# Altium PCB PCB_CSN_V3_1.PcbDoc
Units mil, origin at the board's own origin, x right, y up, seen from the top; angles counter-clockwise.
Board outline 3040 x 2075 mil, 2 copper layers (Top Layer, Bottom Layer); 91 components, 64 nets, 347 pads, 0 vias.
Unrouted connection lines stored in the file: 191.
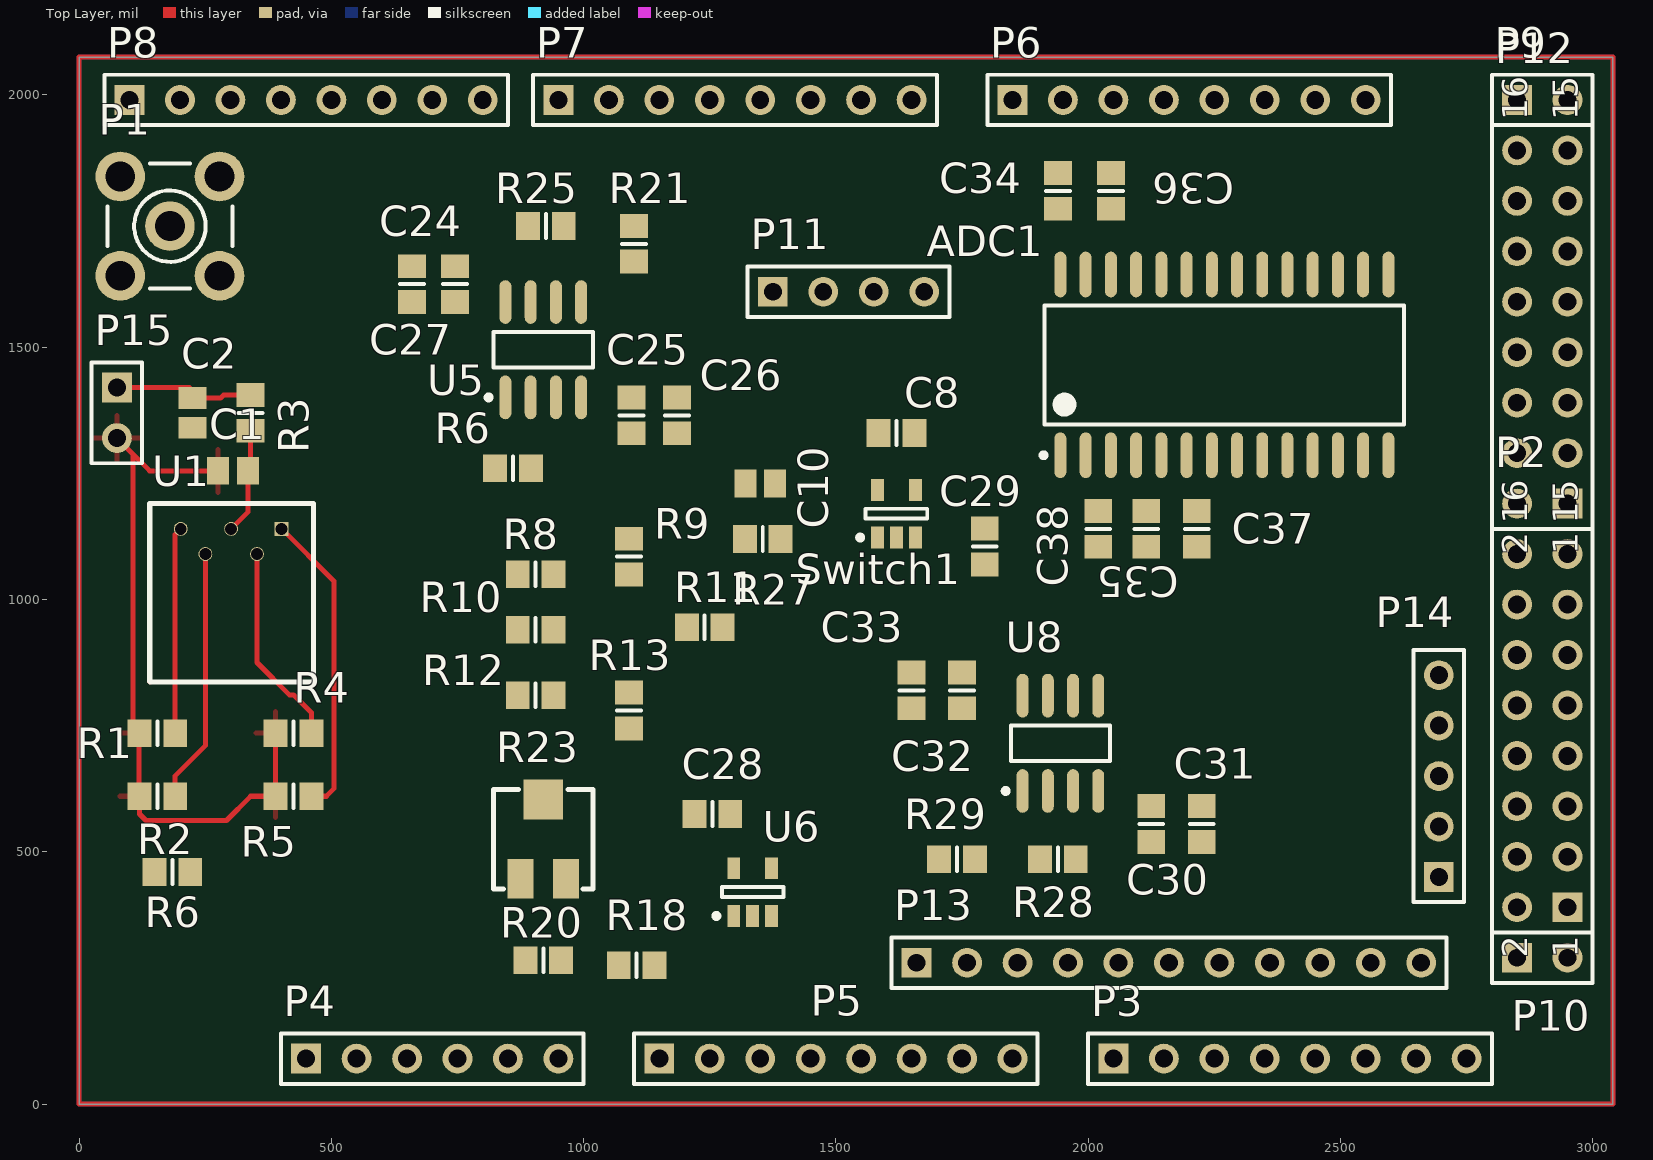
[diagram p0: Top Layer view]
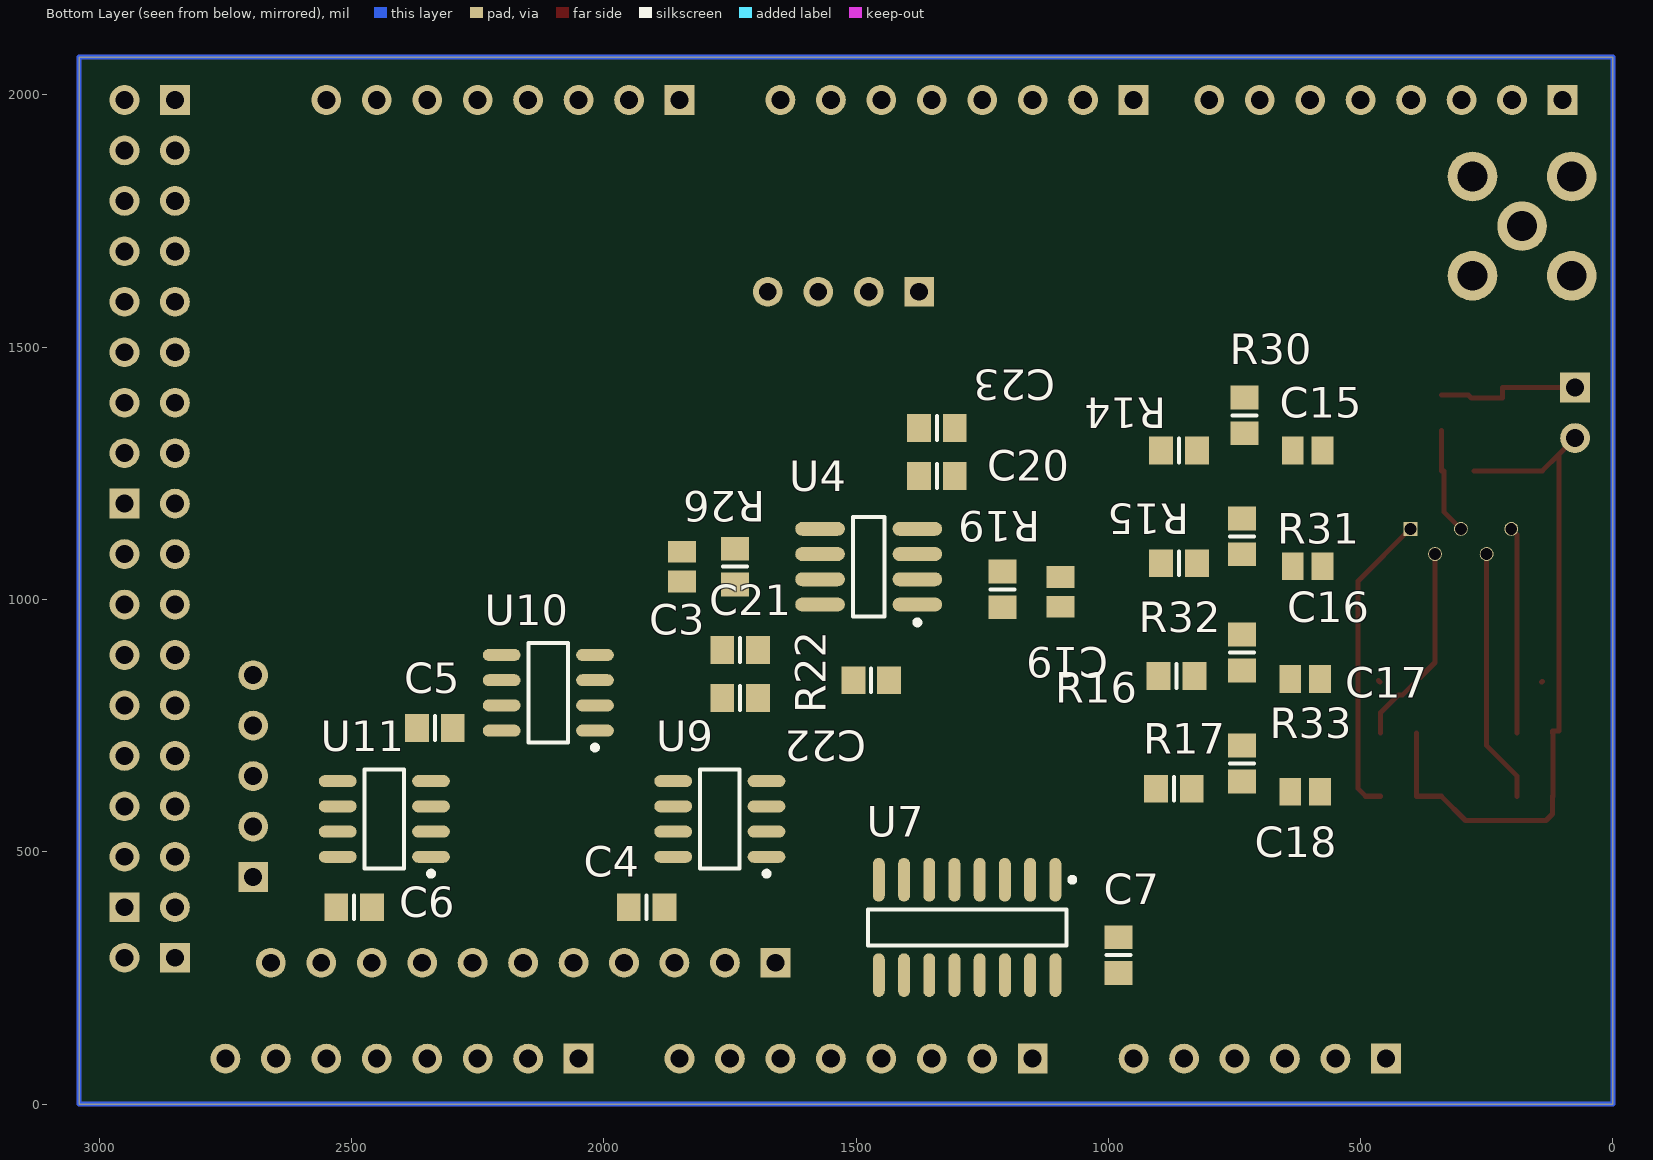
[diagram p1: Bottom Layer view, seen from below]

## Layer stack, top to bottom
Top Layer: signal copper 1.4
Dielectric: dielectric 12.6, FR-4, Dk 4.8
Bottom Layer: signal copper 1.4

## Board outline
0,0 0,2075 3040,2075 3040,0 0,0

## Design rules (kind name [scope] priority, off if disabled: settings)
Clearance [All] p1: gap=15
PolygonConnect [All] p1: connectstyle=Relief reliefconductorwidth=10 reliefentries=4 polygonreliefangle="90 Angle"
RoutingVias [All] p1: holewidth=28 width=50 viastyle="Through Hole" minholewidth=28 minwidth=50 maxholewidth=28 maxwidth=50
SilkscreenOverComponentPads [All] p1: minsilkscreentomaskgap=10
SolderMaskExpansion [All] p1: expansion=4
Width [All] p1: maxlimit=10 minlimit=10 preferedwidth=10
27 further rules are at their usual default settings.

## Classes and differential pairs
net class digital: DGND NetADC1_18 NetADC1_23 NetADC1_25 NetSwitch1_4
net class analog: NetADC1_1 NetADC1_4 NetC29_1 NetR18_2 NetR23_W NetR25_2
component class Hamamatsu_acond_2: C1 C2 C3 C10 C15 C16 C17 C18 C19 C20 C21 C22 C23 C24 C25 C26 C27 C28 P1 P15 R1 R2 R3 R4 R5 R6 R8 R9 R10 R11 R12 R13 R14 R15 R16 R17 R18 R19 R20 R21 R22 R23 R25 R26 R27 R30 R31 R32 R33 U1 U4 U5 U6
component class Logica_ADC: ADC1 C4 C5 C6 C7 C8 C29 C30 C31 C32 C33 C34 C35 C36 C37 C38 P2 P3 P4 P5 P6 P7 P8 P9 P10 P11 P12 P13 P14 R28 R29 Switch1 U7 U8 U9 U10 U11
net class potencia: +5 -5 GND

## Components (designator, comment, footprint, x,y, rotation, side; value= is the part's Value field where it differs from the comment)
ADC1 "LTC1415" SO28_N 2270,1465 r90 top
C1 "Cap" C0805 305,1255 r0 top
C2 "Cap" C0805 225,1370 r90 top
C3 "Cap" C0805 1845,1065 r270 bottom
C4 "Cap" 6-0805_N 1915,390 r180 bottom
C5 "Cap" 6-0805_N 2335,745 r0 bottom
C6 "Cap" 6-0805_N 2495,390 r180 bottom
C7 "Cap" 6-0805_N 980,295 r90 bottom
C8 "Cap" 6-0805_N 1620,1330 r180 top
C10 "Cap" C0805 1350,1230 r0 top
C15 "Cap" C0805 605,1295 r0 bottom
C16 "Cap" C0805 605,1065.76 r0 bottom
C17 "Cap" C0805 610,842.43 r0 bottom
C18 "Cap" C0805 610,619.09 r0 bottom
C19 "Cap" C0805 1095,1015 r270 bottom
C20 "Cap Pol3" 6-0805_N 1340,1245 r0 bottom
C21 "Cap Pol3" 6-0805_N 1730,900 r0 bottom
C22 "Cap" 6-0805_N 1730,805 r180 bottom
C23 "Cap" 6-0805_N 1340,1340 r0 bottom
C24 "Cap" 6-0805_N 745,1625 r270 top
C25 "Cap" 6-0805_N 1095,1365 r270 top
C26 "Cap Pol3" 6-0805_N 1185,1365 r90 top
C27 "Cap Pol3" 6-0805_N 660,1625 r90 top
C28 "Cap" 6-0805_N 1255,575 r180 top
C29 "Cap" 6-0805_N 1795,1105 r90 top
C30 "Cap" 6-0805_N 2125,555 r270 top
C31 "Cap Pol3" 6-0805_N 2225,555 r90 top
C32 "Cap" 6-0805_N 1750,820 r270 top
C33 "Cap Pol3" 6-0805_N 1650,820 r90 top
C34 "Cap Pol3" 6-0805_N 1940,1810 r90 top
C35 "Cap Pol3" 6-0805_N 2115,1140 r270 top
C36 "Cap" 6-0805_N 2045,1810 r270 top
C37 "Cap" 6-0805_N 2215,1140 r90 top
C38 "Cap" 6-0805_N 2020,1140 r270 top
P1 "SMB" SMB_V-RJ45 180,1740 r0 top
P2 "Header 8X2" HDR2X8 2950,390 r90 top
P3 "Header 8" HDR1X8 2050,90 r0 top
P4 "Header 6" HDR1X6 450,90 r0 top
P5 "Header 8" HDR1X8 1150,90 r0 top
P6 "Header 8" HDR1X8 1850,1990 r0 top
P7 "Header 8" HDR1X8 950,1990 r0 top
P8 "Header 8" HDR1X8 100,1990 r0 top
P9 "Header 2" HDR1X2 2850,1990 r0 top
P10 "Header 2" HDR1X2 2850,290 r0 top
P11 "Header 4" HDR1X4 1375,1610 r0 top
P12 "Header 8X2" HDR2X8 2950,1190 r90 top
P13 "Header 11" HDR1X11 1660,280 r0 top
P14 "Header 5" HDR1X5 2695,450 r90 top
P15 "Header 2" HDR1X2 75,1420 r270 top
R1 "Res3" 6-0805_N 155,735 r0 top
R2 "Res3" 6-0805_N 155,610 r0 top
R3 "Res3" 6-0805_N 340,1370 r90 top
R4 "Res3" 6-0805_N 425,735 r0 top
R5 "Res3" 6-0805_N 425,610 r0 top
R6 "Res3" 6-0805_N 185,460 r180 top
R6 "Res3" 6-0805_N 860,1260 r180 top
R8 "Res3" 6-0805_N 905,1050 r180 top
R9 "Res3" 6-0805_N 1090,1085 r270 top
R10 "Res3" 6-0805_N 905,940 r180 top
R11 "Res3" 6-0805_N 1240,945 r180 top
R12 "Res3" 6-0805_N 905,810 r180 top
R13 "Res3" 6-0805_N 1090,780 r90 top
R14 "Res3" 6-0805_N 860,1295 r0 bottom
R15 "Res3" 6-0805_N 860,1071.67 r0 bottom
R16 "Res3" 6-0805_N 865,848.33 r0 bottom
R17 "Res3" 6-0805_N 870,625 r0 bottom
R18 "Res3" 6-0805_N 1105,275 r180 top
R19 "Res3" 6-0805_N 1210,1020 r270 bottom
R20 "Res3" 6-0805_N 920,285 r180 top
R21 "Res3" 6-0805_N 1100,1705 r90 top
R22 "Res3" 6-0805_N 1470,840 r180 bottom
R23 "RPot SM" POT4MM-2 920,525 r90 top
R25 "Res3" 6-0805_N 925,1740 r180 top
R26 "Res3" 6-0805_N 1740,1065 r270 bottom
R27 "Res3" 6-0805_N 1355,1120 r0 top
R28 "Res3" 6-0805_N 1940,485 r0 top
R29 "Res3" 6-0805_N 1740,485 r0 top
R30 "Res3" 6-0805_N 730,1365 r270 bottom
R31 "Res3" 6-0805_N 735,1125 r270 bottom
R32 "Res3" 6-0805_N 735,895 r270 bottom
R33 "Res3" 6-0805_N 735,675 r270 bottom
Switch1 "SN74LVC1G66DBVR" SOT23-5_N 1620,1170 r90 top
U1 "MPPC_S10985" S10985_HAM 140,1190 r0 top
U4 "AD8056" SO-8_M 1475,1065 r0 bottom
U5 "AD8056" S8_N 920,1495 r90 top
U6 "ADCMP600" SOT23-5_N 1335,420 r90 top
U7 "SN74LS279AD" D016_N 1280,350 r270 bottom
U8 "THS4062" S8_N 1945,715 r90 top
U9 "DS1100-500" SO-8_L 1770,565 r0 bottom
U10 "DS1100-500" SO-8_L 2110,815 r0 bottom
U11 "DS1100-500" SO-8_L 2435,565 r0 bottom

## Footprints (in the part's own frame and the unit in brackets; to place one, negate y for a bottom-side part, rotate by r counter-clockwise, add the part's x,y. Pads: shape width x height; smd on the part's side, far side on the other; paste and mask are expansions set on the pad)
6-0805_N [mm] "Chip Resistor, Body 2.0x1.2mm, IPC Medium Density"
  rect 1.2x1.4 smd: 1(-0.9,0) 2(0.9,0)
  silkscreen extent 0,-0.6 0,0.6, body extent -1.07,-0.7 1.07,0.7, height 0.7
C0805 [mm] "Chip Capacitor, Body 2.0x1.3mm, IPC High Density"
  rect 1.1x1.4 smd: 1(-0.75,0) 2(0.75,0)
  body extent -1.1,-0.72 1.1,0.72, height 1.4
D016_N [mm] "SOIC, 16-Leads, Body 9.9x3.9mm, Pitch 1.27mm, IPC Medium Density"
  oval 2.2x0.6 smd: 1(-2.4,4.445) 2(-2.4,3.175) 3(-2.4,1.905) 4(-2.4,0.635) 5(-2.4,-0.635) 6(-2.4,-1.905) 7(-2.4,-3.175) 8(-2.4,-4.445) 9(2.4,-4.445) 10(2.4,-3.175) 11(2.4,-1.905) 12(2.4,-0.635) 13(2.4,0.635) 14(2.4,1.905) 15(2.4,3.175) 16(2.4,4.445)
  silkscreen extent -2.52,-5 0.9,5.42, body extent -1.95,-4.95 1.95,4.95, height 1.75
HDR1X2 [mm] "Connector; Header; 2 Position"
  rect 1.5x1.5 hole 0.9: 1(0,0)
  round 1.5 hole 0.9: 2(2.54,0)
  silkscreen extent -1.27,-1.27 3.81,1.27
HDR1X4 [mm] "Connector; Header; 4 Position"
  rect 1.5x1.5 hole 0.9: 1(0,0)
  round 1.5 hole 0.9: 2(2.54,0) 3(5.08,0) 4(7.62,0)
  silkscreen extent -1.27,-1.27 8.89,1.27
HDR1X5 [mm] "Connector; Header; 5 Position"
  rect 1.5x1.5 hole 0.9: 1(0,0)
  round 1.5 hole 0.9: 2(2.54,0) 3(5.08,0) 4(7.62,0) 5(10.16,0)
  silkscreen extent -1.27,-1.27 11.43,1.27
HDR1X6 [mm] "Connector; Header; 6 Position"
  rect 1.5x1.5 hole 0.9: 1(0,0)
  round 1.5 hole 0.9: 2(2.54,0) 3(5.08,0) 4(7.62,0) 5(10.16,0) 6(12.7,0)
  silkscreen extent -1.27,-1.27 13.97,1.27
HDR1X8 [mm] "Connector; Header; 8 Position"
  rect 1.5x1.5 hole 0.9: 1(0,0)
  round 1.5 hole 0.9: 2(2.54,0) 3(5.08,0) 4(7.62,0) 5(10.16,0) 6(12.7,0) 7(15.24,0) 8(17.78,0)
  silkscreen extent -1.27,-1.27 19.05,1.27
HDR1X11 [mm] "Connector; Header; 11 Position"
  rect 1.5x1.5 hole 0.9: 1(0,0)
  round 1.5 hole 0.9: 2(2.54,0) 3(5.08,0) 4(7.62,0) 5(10.16,0) 6(12.7,0) 7(15.24,0) 8(17.78,0) 9(20.32,0) 10(22.86,0) 11(25.4,0)
  silkscreen extent -1.27,-1.27 26.67,1.27
HDR2X8 [mm] "Connector; Header; 8x2 Position"
  rect 1.5x1.5 hole 0.9: 1(0,0)
  round 1.5 hole 0.9: 2(0,2.54) 3(2.54,0) 4(2.54,2.54) 5(5.08,0) 6(5.08,2.54) 7(7.62,0) 8(7.62,2.54) 9(10.16,0) 10(10.16,2.54) 11(12.7,0) 12(12.7,2.54) 13(15.24,0) 14(15.24,2.54) 15(17.78,0) 16(17.78,2.54)
  silkscreen extent -1.27,-1.27 19.05,3.81
POT4MM-2 [mm] "Square Trimming Potentiometer"
  rect 2x1.3 smd: CCW(-2,-1.15) CW(-2,1.15)
  rect 2x2 smd: W(2,0)
  silkscreen extent -2.5,-2.5 2.5,2.5
S8_N [mm] "SOIC, 8-Leads, Body 4.9x3.9mm, Pitch 1.27mm, IPC Medium Density"
  oval 2.2x0.6 smd: 1(-2.4,1.905) 2(-2.4,0.635) 3(-2.4,-0.635) 4(-2.4,-1.905) 5(2.4,-1.905) 6(2.4,-0.635) 7(2.4,0.635) 8(2.4,1.905)
  silkscreen extent -2.52,-2.5 0.9,2.88, body extent -2,-2.5 2,2.5, height 1.76
S10985_HAM [mm]
  rect 0.7x0.7 hole 0.6: 1(6.64,-1.27)
  round 0.7 hole 0.6: 2(5.4,-2.54) 3(4.1,-1.27) 4(2.8,-2.54) 5(1.56,-1.27)
  Top Layer lines w0.254: 0,-8.95 0.025,-8.975 ; 8.175,-8.975 8.25,-8.9
  silkscreen extent 0,-8.97 8.25,0
SMB_V-RJ45 [mm] "Connector; SMB Straight"
  round 2.5 hole 1.5: 1(0,0) 2(-2.5,-2.5) 2(-2.5,2.5) 2(2.5,-2.5) 2(2.5,2.5)
  silkscreen extent -3.15,-3.15 3.15,3.15
SO28_N [mm] "28-Pin Plastic Small Outline Integrated Circuit 1.27 mm Pitch, IPC Medium Density"
  oval 2.3x0.6 smd: 1(-4.55,8.255) 2(-4.55,6.985) 3(-4.55,5.715) 4(-4.55,4.445) 5(-4.55,3.175) 6(-4.55,1.905) 7(-4.55,0.635) 8(-4.55,-0.635) 9(-4.55,-1.905) 10(-4.55,-3.175) 11(-4.55,-4.445) 12(-4.55,-5.715) 13(-4.55,-6.985) 14(-4.55,-8.255) 15(4.55,-8.255) 16(4.55,-6.985) 17(4.55,-5.715) 18(4.55,-4.445) 19(4.55,-3.175) 20(4.55,-1.905) 21(4.55,-0.635) 22(4.55,0.635) 23(4.55,1.905) 24(4.55,3.175) 25(4.55,4.445) 26(4.55,5.715) 27(4.55,6.985) 28(4.55,8.255)
  silkscreen extent -4.67,-9.05 3,9.23, body extent -3.8,-9.06 3.8,9.06, height 2.65
SO-8_L [mm] "SOIC, 8-Leads, Body 4.9x3.9mm, Pitch 1.27mm, IPC High Density"
  oval 1.9x0.6 smd: 1(-2.35,1.905) 2(-2.35,0.635) 3(-2.35,-0.635) 4(-2.35,-1.905) 5(2.35,-1.905) 6(2.35,-0.635) 7(2.35,0.635) 8(2.35,1.905)
  silkscreen extent -2.47,-2.5 1,2.88, body extent -1.95,-2.45 1.95,2.45, height 1.75
SO-8_M [mm] "SOIC, 8-Leads, Body 4.9x3.9mm, Pitch 1.27mm, IPC Low Density"
  oval 2.5x0.7 smd: 1(-2.45,1.905) 2(-2.45,0.635) 3(-2.45,-0.635) 4(-2.45,-1.905) 5(2.45,-1.905) 6(2.45,-0.635) 7(2.45,0.635) 8(2.45,1.905)
  silkscreen extent -2.57,-2.5 0.8,2.93, body extent -2,-2.5 2,2.5, height 1.75
SOT23-5_N [mm] "SOT23, 5-Leads, Body 2.9x1.6mm, Pitch 0.95mm, Lead Span 2.8mm, IPC Medium Density"
  rect 1.1x0.65 smd: 1(-1.2,0.95) 2(-1.2,0) 3(-1.2,-0.95) 4(1.2,-0.95) 5(1.2,0.95)
  silkscreen extent -1.32,-1.55 0.25,1.95, body extent -0.9,-1.55 0.9,1.55, height 1.45

## Part data
C1 C2 C3 C4 C5 C6 C7 C8 C10 C15 C16 C17 C18 C19 C22 C23 C24 C25 C28 C29 C30 C32 C36 C37 C38: "Capacitor"
C20 C21 C26 C27 C31 C33 C34 C35: "Polarized Capacitor (Surface Mount)"
P1: "SMB Straight Connector"
P2 P12: "Header, 8-Pin, Dual row"
P3 P5 P6 P7 P8: "Header, 8-Pin"
P4: "Header, 6-Pin"
P9 P10 P15: "Header, 2-Pin"
P11: "Header, 4-Pin"
P13: "Header, 11-Pin"
P14: "Header, 5-Pin"
R1 R2 R3 R4 R5 R6 R6 R8 R9 R10 R11 R12 R13 R14 R15 R16 R17 R18 R19 R20 R21 R22 R25 R26 R27 R28 R29 R30 R31 R32 R33: "Resistor"
R23: "Square Trimming Potentiometer"
U4: library part AD8002AR, "Dual 600MHz, 50mW Current Feedback Amplifier"
U5 U8: library part LT1253CS8, "Low Cost Dual Video Amplifier"
U7: "Quadruple S-R Latches"

## Nets (pads, with @x,y where several pads share a name; then routed paths per layer and width w, separated by ;. In a path a pad name is that pad's centre, name@x,y a point inside that pad or via, vN(x,y) a via of type N, cw(c..) or ccw(c..) an arc to the next point about the centre after c; other vN are vias at no path point)
70_GND: C1.1 P15.2 R1.1 R2.1 R4.1 R5.1 R6.2@149.57,460 | length 1377.8
  Top Layer w10: P15.2 107,1288 ; R1.1 119.57,739 R1.1@119,739 ; C1.1 140,1255 107,1288 ; R4.1 R5.1 340,610 292,562 132.57,562 119.57,575 R2.1 119,610 R1.1@119,739 ; 107,1288 107,739 R1.1@119,739
+5: ADC1.21 ADC1.26 ADC1.27 ADC1.28 C4.2 C5.1 C6.1 C7.1 C8.2 C21.1 C22.2 C24.2 C27.1 C28.1 C32.2 C33.1 C34.1 C36.2 P11.1 R18.1 Switch1.5 U4.8 U5.8 U6.5 U7.16 U8.8 U9.8 U10.8 U11.8
+70V: C2.2 P15.1 R3.2 | length 287.9
  Top Layer w10: P15.1 219,1420 219,1399.53 C2.2 280.53,1399.53 286.43,1405.43 R3.2
-5: C20.2 C23.2 C25.1 C26.2 C30.1 C31.2 P11.2 U4.4 U5.4 U8.4
DGND: ADC1.14 ADC1.20 ADC1.22 ADC1.24 C4.1 C5.2 C6.2 C7.2 C8.1 P10.1 Switch1.3 U7.8 U9.4 U10.4 U11.4
GND: ADC1.2 ADC1.5 ADC1.19 C2.1 C20.1 C21.2 C22.1 C23.1 C24.1 C25.2 C26.1 C27.2 C28.2 C30.2 C31.1 C32.1 C33.2 C34.2 C35.2 C36.1 C37.1 C38.2 P1.2 P10.2 P11.4 R6.1@220.43,460 R9.1 R11.1 R13.1 R20.1 R23.CCW R28.2 R30.1 R31.1 R32.1 R33.1 U4.3 U4.5 U5.3 U5.5 U6.2 U8.3
NetADC1_1: ADC1.1 C29.2 Switch1.2 U8.1
NetADC1_3: ADC1.3 C38.1
NetADC1_4: ADC1.4 C35.1 C37.2
NetADC1_6: ADC1.6 P12.5
NetADC1_7: ADC1.7 P12.6
NetADC1_8: ADC1.8 P12.7
NetADC1_9: ADC1.9 P12.8
NetADC1_10: ADC1.10 P12.9
NetADC1_11: ADC1.11 P12.10
NetADC1_12: ADC1.12 P12.11
NetADC1_13: ADC1.13 P12.12
NetADC1_15: ADC1.15 P12.13
NetADC1_16: ADC1.16 P12.14
NetADC1_17: ADC1.17 P12.15
NetADC1_18: ADC1.18 P12.16
NetADC1_23: ADC1.23 P12.4 P13.11
NetADC1_25: ADC1.25 P7.6
NetC1_2: C1.2 R3.1 U1.3 | length 213.8
  Top Layer w10: U1.3 334.53,1173.11 C1.2 340,1255 R3.1
NetC3_1: C3.1 R22.1 R26.1 U4.6
NetC3_2: C3.2 C10.1 R26.2 R27.1 U4.7
NetC10_2: C10.2 R6.1@895.43,1260 R27.2 U5.2
NetC15_1: C15.1 R5.2 U1.1 | length 608.7
  Top Layer w10: U1.1 505,1036.42 505,625 490,610 R5.2
NetC15_2: C15.2 R14.1 R30.2
NetC16_1: C16.1 R4.2 U1.2 | length 404.6
  Top Layer w10: U1.2 352.6,875 416.6,811 425,811 460.43,775.57 R4.2
NetC16_2: C16.2 R15.1 R31.2
NetC17_1: C17.1 R2.2 U1.4 | length 504.8
  Top Layer w10: R2.2 190.43,650.43 250.24,710.24 U1.4
NetC17_2: C17.2 R16.1 R32.2
NetC18_1: C18.1 R1.2 U1.5 | length 409.5
  Top Layer w10: R1.2 190.43,1129.02 U1.5
NetC18_2: C18.2 R17.1 R33.2
NetC19_1: C19.1 R14.2 R15.2 R16.2 R17.2 R19.1 U4.2
NetC19_2: C19.2 R19.2 R22.2 U4.1
NetC29_1: C29.1 R28.1 R29.2 Switch1.1 U8.2
NetP1_1: P1.1 R12.1 R13.2
NetP7_5: P7.5 U6.1 U7.5 U9.1
NetP12_3: P12.3 U7.6
NetP13_1: P13.1 U9.7
NetP13_2: P13.2 U9.2
NetP13_3: P13.3 U9.6
NetP13_4: P13.4 U9.3
NetP13_5: P13.5 U9.5 U10.1
NetP13_6: P13.6 U10.7
NetP13_7: P13.7 U10.2
NetP13_8: P13.8 U10.6
NetP13_9: P13.9 U10.3
NetP13_10: P13.10 U10.5 U11.1
NetP14_1: P14.1 U11.7
NetP14_2: P14.2 U11.2
NetP14_3: P14.3 U11.6
NetP14_4: P14.4 U11.3
NetP14_5: P14.5 U11.5
NetR6_2: R6.2@824.57,1260 R8.2 R10.2 R12.2 U5.1
NetR8_1: R8.1 R9.2 R29.1
NetR10_1: R10.1 R11.2 R21.1
NetR18_2: R18.2 R20.2 R23.CW
NetR21_2: R21.2 R25.1 U5.6
NetR23_W: R23.W U6.3
NetR25_2: R25.2 U5.7 U6.4
NetSwitch1_4: Switch1.4 U7.7
pads on no net: P2.1 P2.2 P2.3 P2.4 P2.5 P2.6 P2.7 P2.8 P2.9 P2.10 P2.11 P2.12 P2.13 P2.14 P2.15 P2.16 P3.1 P3.2 P3.3 P3.4 P3.5 P3.6 P3.7 P3.8 P4.1 P4.2 P4.3 P4.4 P4.5 P4.6 P5.1 P5.2 P5.3 P5.4 P5.5 P5.6 P5.7 P5.8 P6.1 P6.2 P6.3 P6.4 P6.5 P6.6 P6.7 P6.8 P7.1 P7.2 P7.3 P7.4 P7.7 P7.8 P8.1 P8.2 P8.3 P8.4 P8.5 P8.6 P8.7 P8.8 P9.1 P9.2 P11.3 P12.1 P12.2 U7.1 U7.2 U7.3 U7.4 U7.9 U7.10 U7.11 U7.12 U7.13 U7.14 U7.15 U8.5 U8.6 U8.7

## Polygon pours and split planes (outlines as drawn)
70_GND on Top Layer "Top Layer-No Net" (none, pour order 8): 0,1500 550,1500 550,530 545,525 540,520 0,520 0,525

## Other copper
Multi-Layer:
  the board outline again, w10

## Text inside footprints (layer, text, board x,y; h text height)
P2: Top Overlay "16" at 2870,1150 h50 r90; Top Overlay "15" at 2970,1150 h50 r90; Top Overlay "1" at 2970,290 h50 r90; Top Overlay "2" at 2870,290 h50 r90
P12: Top Overlay "16" at 2870,1950 h50 r90; Top Overlay "15" at 2970,1950 h50 r90; Top Overlay "1" at 2970,1090 h50 r90; Top Overlay "2" at 2870,1090 h50 r90